# Altium PCB trs.PcbDoc
Units mm, origin at the board's own origin, x right, y up, seen from the top; angles counter-clockwise.
Board outline 152.4 x 101.6 mm, 2 copper layers (Top Layer, Bottom Layer); 39 components, 46 nets, 169 pads, 97 vias.
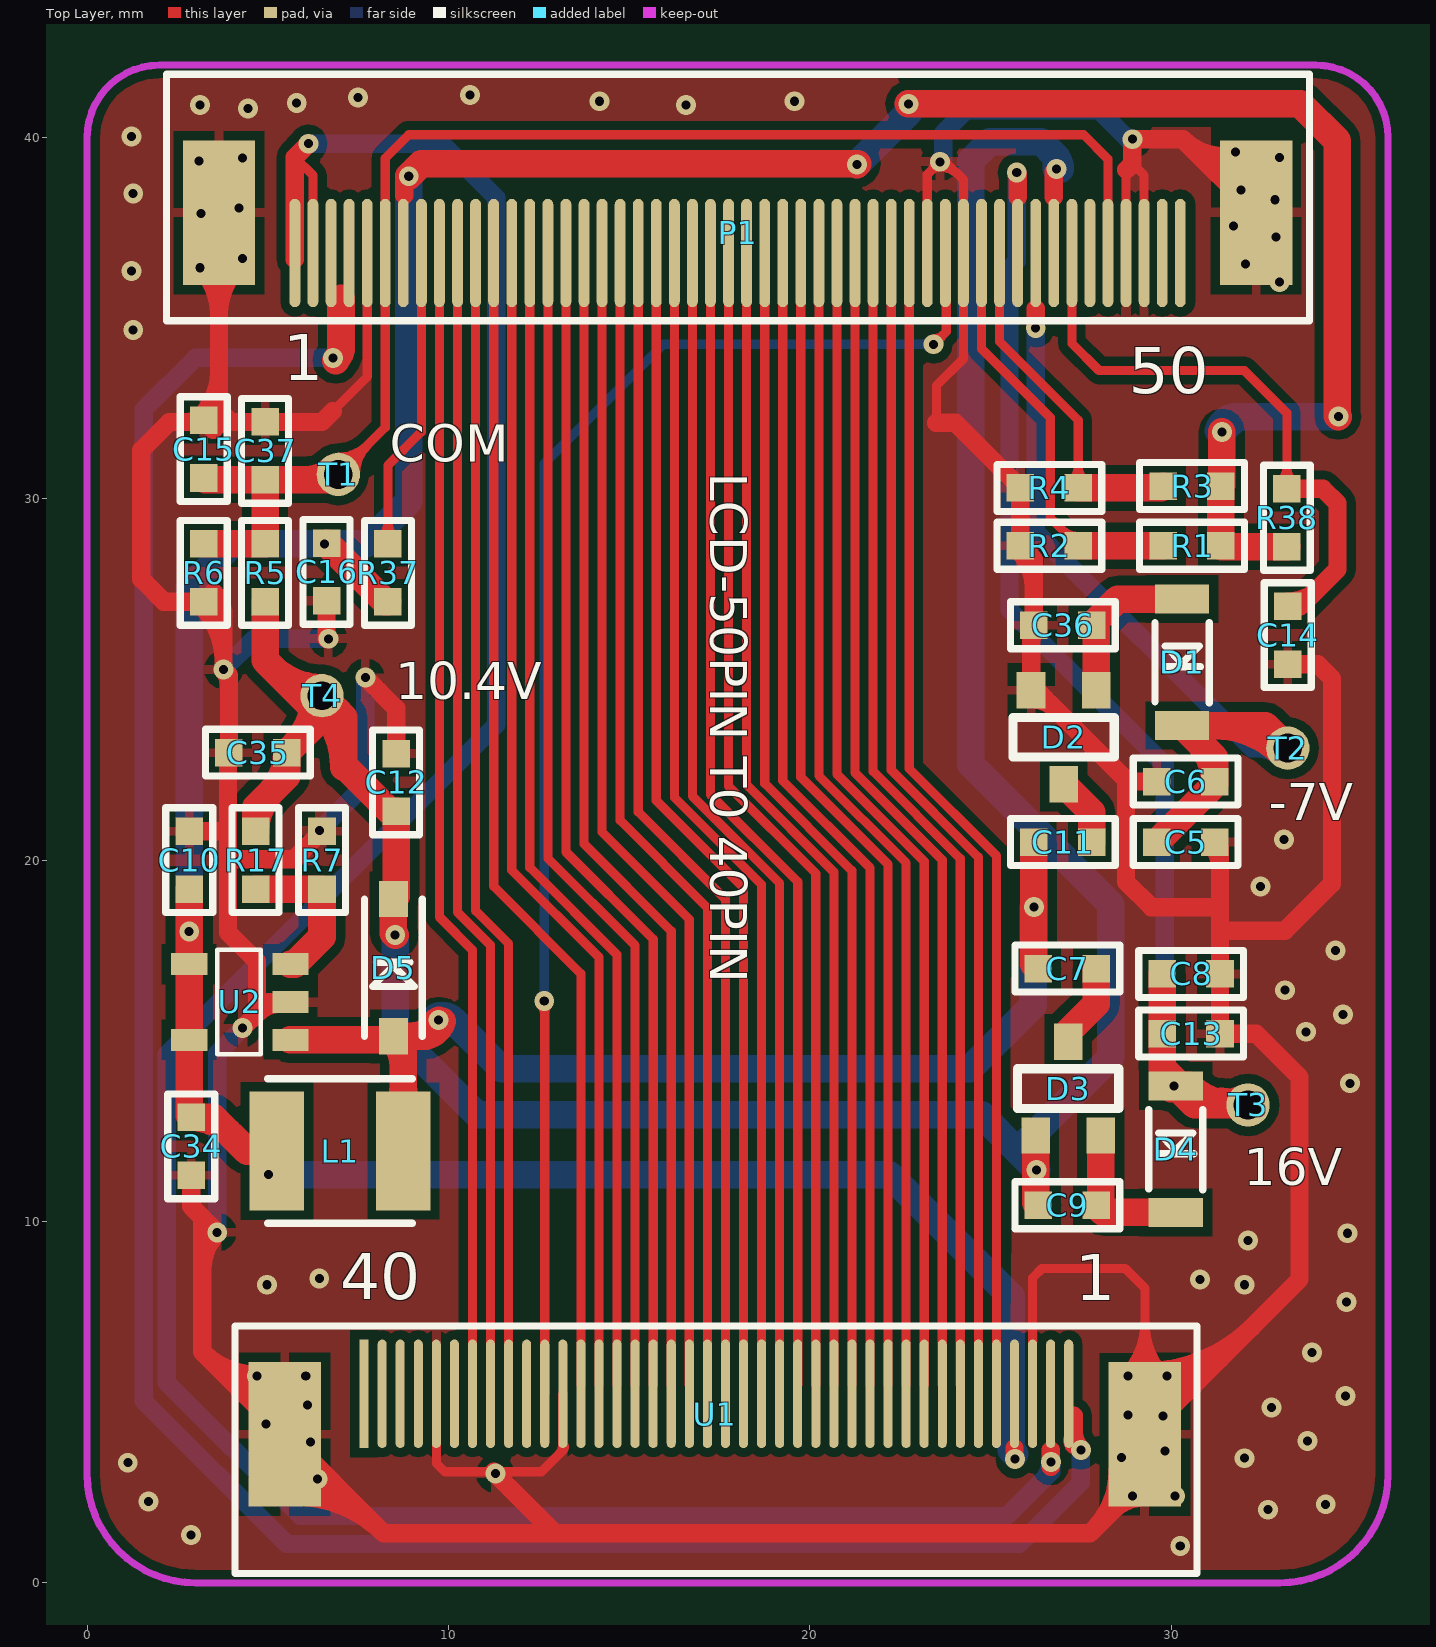
[diagram p0: Top Layer view]
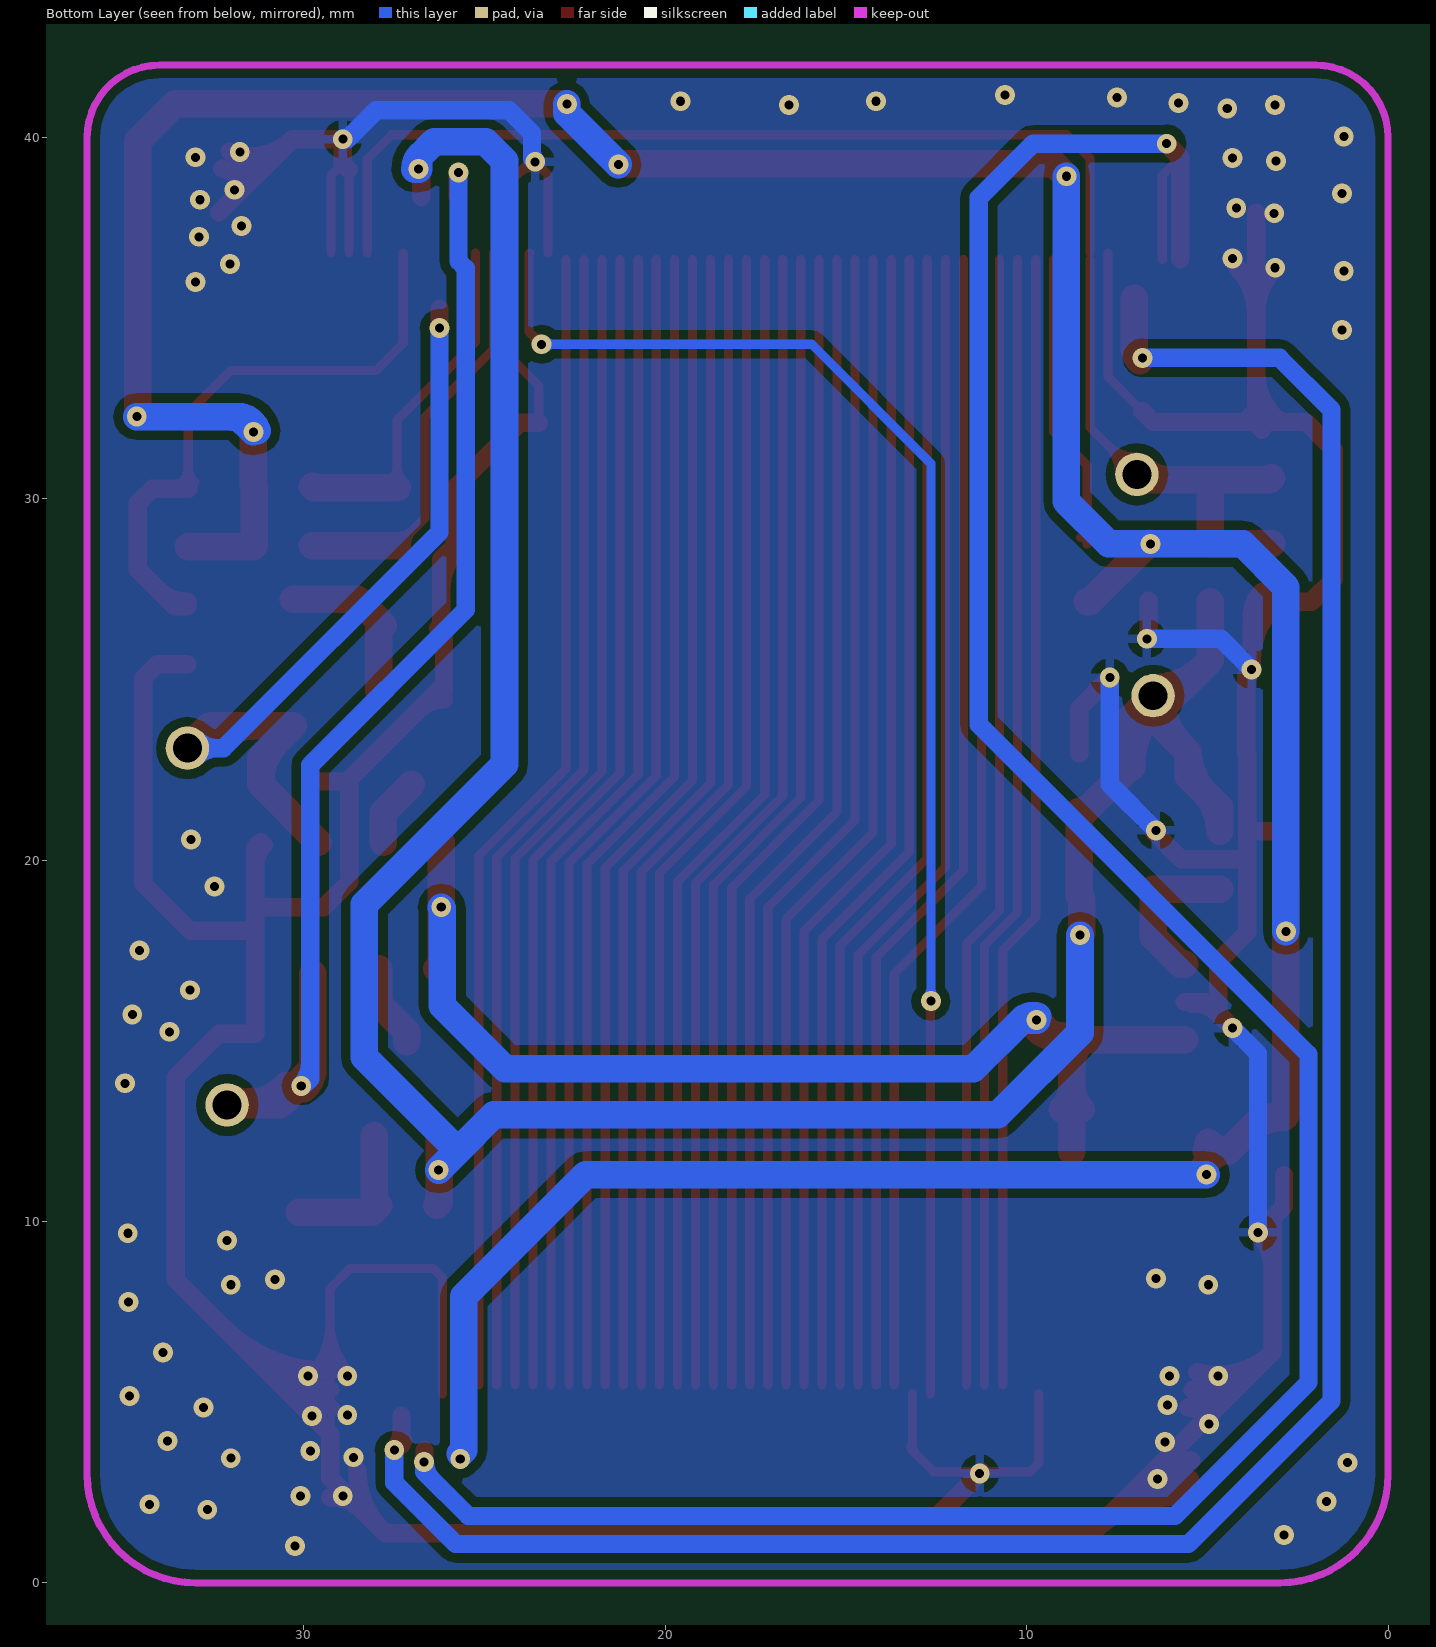
[diagram p1: Bottom Layer view, seen from below]

## Layer stack, top to bottom
Top Layer: signal copper 0.0356
Dielectric: dielectric 0.32, FR-4, Dk 4.8
Bottom Layer: signal copper 0.0356

## Board outline
-42.305,-35.158 110.095,-35.158 110.095,66.442 -42.305,66.442

## Design rules (kind name [scope] priority, off if disabled: settings)
Clearance [All] p1: gap=0.127
ComponentClearance [All] p1 off: gap=0.254 collisioncheckmode=3 verticalgap=0.01 showdistances=FALSE
Height [All] p1 off: minheight=0 maxheight=25.4 prefheight=12.7
HoleToHoleClearance [All] p1: gap=0 allowstackedmicrovias=TRUE
MinimumSolderMaskSliver [All] p1: minsoldermaskwidth=0
PolygonConnect [All] p1: connectstyle=Relief reliefconductorwidth=0.254 reliefentries=4 polygonreliefangle="90 Angle" airgapwidth=0.254
RoutingVias [All] p1: holewidth=0.25 width=0.55 viastyle="Through Hole" minholewidth=0.25 minwidth=0.55 maxholewidth=2 maxwidth=10
SilkToSilkClearance [All] p1: silktosilkclearance=0
SilkToSolderMaskClearance [IsPad] p1: minsilkscreentomaskgap=0 clearancetoexposedcopper=TRUE
SolderMaskExpansion [All] p1: expansion=0.102
Width [All] p1: maxlimit=2.54 minlimit=0.127 preferedwidth=0.127 minimp=50.000000 maximp=50.000000 favimp=50.000000
22 further rules are at their usual default settings.

## Components (designator, comment, footprint, x,y, rotation, side; value= is the part's Value field where it differs from the comment)
C5 "104" 0603C 29.6,20.5 r0 top
C6 "C10uF" 0603C 31.2,22.175 r180 top
C7 "C1UF" 0603C 26.325,17 r0 top
C8 "C10uF" 0603C 29.75,16.85 r0 top
C9 "C1UF" 0603C 26.325,10.45 r0 top
C10 "104" 0603C 2.825,19.2 r90 top
C11 "C1UF" 0603C 27.8,20.5 r180 top
C12 "104" 0603C 8.55,21.35 r90 top
C13 "104" 0603C 29.75,15.2 r0 top
C14 "104" 0603C 33.225,25.425 r90 top
C15 "104" 0603C 3.225,32.175 r270 top
C16 "104" 0603C 6.625,27.175 r90 top
C34 "C10uF" 0603C 2.88,12.88 r270 top
C35 "C10uF" 0603C 5.525,22.975 r180 top
C36 "C10uF" 0603C 27.8,26.5 r180 top
C37 "C10uF" 0603C 4.925,30.525 r90 top
D1 "ZMM3V9" LL34 29.55,27.225 r270 top
D2 "BAT54S" SOT-23-3 27.925,24.7 r180 top
D3 "BAT54S" SOT-23-3 26.25,12.375 r0 top
D4 "ZMM4V7" LL34 29.375,13.75 r270 top
D5 "MBR0520" SOD123 9.275,15.125 r90 top
L1 "Inductor-4.7uH" ins-443 9,9.95 r90 top
P1 "FPC50-0.5-UP" FPC50-0.5 18,35.175 r90 top locked
R1 "10K" 0603R 29.775,28.7 r0 top
R2 "10K" 0603R 27.425,28.7 r180 top
R3 "10K" 0603R 29.775,30.35 r0 top
R4 "10K" 0603R 27.425,30.3 r180 top
R5 "51K" 0603R 4.925,27.15 r90 top
R6 "39K" 0603R 3.225,27.15 r90 top
R7 "100K" 0603R 6.5,20.8 r270 top
R17 "R732K" 0603R 4.663,19.2 r90 top
R37 "10K" 0603R 8.325,28.75 r270 top
R38 "10K" 0603R 33.2,30.275 r270 top
T1 "TP" TEST_POINT 6.95,30.675 r0 top
T2 "TP" TEST_POINT 33.225,23.1 r0 top
T3 "TP" TEST_POINT 32.125,13.225 r90 top
T4 "TP" TEST_POINT 6.5,24.55 r90 top
U1 "AT043TN24" FPC40-N 27.164,5.232 r270 top locked
U2 "TPS61040" SOT23-5 5.625,15.025 r90 top

## Footprints (in the part's own frame and the unit in brackets; to place one, negate y for a bottom-side part, rotate by r counter-clockwise, add the part's x,y. Pads: shape width x height; smd on the part's side, far side on the other; paste and mask are expansions set on the pad)
0603C [mil]
  rect 30x30 smd: 1(0,0) 2(62.99,0)
  silkscreen extent -26,-26 89,26
0603R [mil]
  rect 30x30 smd: 1(0,0) 2(62.99,0)
  silkscreen extent -26,-26 89,26
FPC40-N [mm]
  rect 4x2 smd: 0(1.12,2.104) 0(1.12,-21.695)
  oval 3x0.25 smd: 1(0,0) 2(0,-0.5) 3(0,-1) 4(0,-1.5) 5(0,-2) 6(0,-2.5) 7(0,-3) 8(0,-3.5) 9(0,-4) 10(0,-4.5) 11(0,-5) 12(0,-5.5) 13(0,-6) 14(0,-6.5) 15(0,-7) 16(0,-7.5) 17(0,-8) 18(0,-8.5) 19(0,-9) 20(0,-9.5) 21(0,-10) 22(0,-10.5) 23(0,-11) 24(0,-11.5) 25(0,-12) 26(0,-12.5) 27(0,-13) 28(0,-13.5) 29(0,-14) 30(0,-14.5) 31(0,-15) 32(0,-15.5) 33(0,-16) 34(0,-16.5) 35(0,-17) 36(0,-17.5) 37(0,-18) 38(0,-18.5) 39(0,-19)
  rect 3x0.25 smd: 40(0,-19.5)
  silkscreen extent -1.88,-23.08 4.97,3.55
FPC50-0.5 [mm]
  rect 4x2 smd: 0(2.745,14.35) 0(2.745,-14.35)
  oval 3x0.3 smd: 1(1.625,12.25) 2(1.625,11.75) 3(1.625,11.25) 4(1.625,10.75) 5(1.625,10.25) 6(1.625,9.75) 7(1.625,9.25) 8(1.625,8.75) 9(1.625,8.25) 10(1.625,7.75) 11(1.625,7.25) 12(1.625,6.75) 13(1.625,6.25) 14(1.625,5.75) 15(1.625,5.25) 16(1.625,4.75) 17(1.625,4.25) 18(1.625,3.75) 19(1.625,3.25) 20(1.625,2.75) 21(1.625,2.25) 22(1.625,1.75) 23(1.625,1.25) 24(1.625,0.75) 25(1.625,0.25) 26(1.625,-0.25) 27(1.625,-0.75) 28(1.625,-1.25) 29(1.625,-1.75) 30(1.625,-2.25) 31(1.625,-2.75) 32(1.625,-3.25) 33(1.625,-3.75) 34(1.625,-4.25) 35(1.625,-4.75) 36(1.625,-5.25) 37(1.625,-5.75) 38(1.625,-6.25) 39(1.625,-6.75) 40(1.625,-7.25) 41(1.625,-7.75) 42(1.625,-8.25) 43(1.625,-8.75) 44(1.625,-9.25) 45(1.625,-9.75) 46(1.625,-10.25) 47(1.625,-10.75) 48(1.625,-11.25) 49(1.625,-11.75) 50(1.625,-12.25)
  silkscreen extent -0.25,-15.83 6.58,15.8
ins-443 [mm]
  rect 3.3x1.5 smd: 1(2,3.75) 2(2,0.25)
  silkscreen extent 0,0 4,4
LL34 [mm]
  rect 0.8x1.5 smd: 1(0,0.75) 2(3.5,0.75)
  silkscreen extent 0.65,0 2.88,1.5
SOD123 [mm]
  rect 1x0.8 smd: 1(0,0.8) 2(3.8,0.8)
  silkscreen extent 0,0 3.8,1.6
SOT23-5 [mm]
  rect 0.6x1 smd: 1(0,0) 2(1.05,0) 3(2.1,0) 4(2.1,2.8) 5(0,2.8)
  silkscreen extent -0.4,0.82 2.5,2.02
SOT-23-3 [mm]
  rect 0.8x1 smd: 1(0,0) 2(1.8,0) 3(0.9,2.6)
  silkscreen extent -0.5,0.75 2.3,1.85
TEST_POINT [mm]
  round 1.2 hole 0.8: 1(0,0)

## Part data
C5 C7 C9 C10 C11 C12 C13 C14 C15 C16: library part C0.1uF
C6 C8 C34 C35 C36 C37: library part "Cap Pol1", "Polarized Capacitor (Radial)"
D1 D4 D5: library part Diode
L1: library part Inductor-100uH
P1: library part LCD-7-50PIN
R1 R2 R3 R4 R5 R6 R7 R17 R37 R38: library part R1M

## Via types
v1: diameter 0.55, hole 0.25, Top Layer to Bottom Layer, 97 vias

## Nets (pads, with @x,y where several pads share a name; then routed paths per layer and width w, separated by ;. In a path a pad name is that pad's centre, name@x,y a point inside that pad or via, vN(x,y) a via of type N, cw(c..) or ccw(c..) an arc to the next point about the centre after c; other vN are vias at no path point)
3V3: C10.1 C16.2 C34.1 L1.1 P1.7 R1.2 R3.2 R37.2 R38.2 U1.4 U2.4 U2.5 | length 112.5
  Top Layer w0.508: 8.775,38.4 v1@8.775,38.775 ; 8.775,38.573 cw(c9.252,38.573) v1@8.915,38.91 ; v1@25.664,3.425 25.664,3.725
  Top Layer w0.762: C10.1 v1(2.825,18.025) U2.4 U2.5 2.825,12.935 C34.1 ; 3.93,12.445 ccw(c2.88,11.395) C34.1 ; L1.1@4.975,11.704 ccw(c4.425,11.212) 4.425,11.95 ; L1.1@4.975,12.196 cw(c4.425,12.688) 4.425,11.95 ; L1.1@5.025,11.95 4.425,11.95 ; L1.1@5.13,11.31 ccw(c4.425,11.241) 4.425,11.95 ; C16.2 8.25,27.15 R37.2 ; v1(8.9,38.925) 9.25,39.275 21.325,39.275 v1(21.3,39.25) ; v1(22.725,40.925) 33.575,40.925 34.6,39.9 34.6,32.3 v1(34.625,32.275) ; v1(31.4,31.85) 31.4,30.375 R3.2 R1.2 31.4,28.675 R38.2 ; C34.1 3.495,12.88 4.425,11.95
  Bottom Layer w0.762: v1(2.825,18.025) 2.825,27.55 4.025,28.75 v1(6.575,28.75) 7.725,28.75 8.9,29.925 v1(8.9,38.925) ; v1(5.025,11.3) 22.2,11.3 25.575,7.925 25.575,3.675 v1@25.675,3.575 ; v1(21.3,39.25) 22.725,40.675 v1(22.725,40.925) ; v1@31.298,31.88 cw(c31.825,31.726) 31.825,32.275 ; v1@31.325,31.925 cw(c32.17,31.08) 32.17,32.275 ; v1(31.4,31.85) 31.825,32.275 ; v1(34.625,32.275) 31.825,32.275
  other v1: 25.675,3.425
10V4: C9.1 C12.1 C35.1 D3.1 D5.2 P1.43 R5.1 R17.2 T4.1 | length 82.9
  Top Layer w0.508: 26.75,38.35 26.75,39.05 v1(26.825,39.125)
  Top Layer w0.762: R5.1 4.925,25.525 6.5,23.95 ; 5.065,21.865 ccw(c3.956,22.975) C35.1 ; 5.102,25.348 ccw(c6.5,26.746) T4.1@6.5,24.769 ; 5.131,21.931 ccw(c6.262,20.8) R17.2 4.663,21.462 5.525,22.325 C35.1 ; C35.1@5.702,23.152 ccw(c4.304,24.55) T4.1@6.281,24.55 ; T4.1@6.345,24.395 cw(c4.523,22.573) 7.1,22.573 ; T4.1@6.492,24.331 cw(c6.47,23.701) 7.1,23.701 ; v1(8.525,17.925) 8.475,17.975 D5.2 8.55,19 C12.1 8.375,21.35 7.1,22.625 7.1,23.95 T4.1 6.5,23.95 ; D3.1 26.25,10.525 C9.1 ; C35.1 6.5,23.95
  Bottom Layer w0.762: v1(8.525,17.925) 8.525,15.225 10.8,12.95 24.75,12.95 25.737,11.962 ; v1(26.275,11.425) 25.737,11.962 ; 26.776,39.499 cw(c26.402,39.125) v1@26.931,39.125 ; v1(26.825,39.125) 26.825,39.45 26.4,39.875 24.975,39.875 24.45,39.35 24.45,22.65 28.325,18.775 28.325,14.55 25.737,11.962
16V: C8.1 C13.1 D4.1 P1.41 T3.1 | length 38
  Top Layer w0.508: v1(25.725,39.025) 25.75,39 25.75,38.35
  Top Layer w0.762: 29.75,14.279 ccw(c30.604,14.279) D4.1@30,13.675 ; C8.1 C13.1 29.75,14.25 ; D4.1@30.003,13.672 cw(c30.536,14.25) 29.75,14.25 ; D4.1 30.65,13.225 ; D4.1@30.125,13.875 29.75,14.25 ; D4.1@30.488,13.763 ccw(c31.788,15.063) T3.1@31.788,13.225 ; D4.1@30.494,13.746 ccw(c31.056,13.631) 30.65,13.225 ; 31.389,13.332 ccw(c31.602,14.13) T3.1@32.015,13.415 ; T3.1 30.65,13.225
  Bottom Layer w0.508: v1(25.725,39.025) 25.725,36.575 25.525,36.375 25.525,26.925 29.825,22.625 29.825,13.95 30.025,13.75 v1(30.075,13.75) ; 29.825,14.404 ccw(c30.729,14.404) v1@30.09,13.765
-7V: C5.1 C6.1 D1.2 P1.42 T2.1 | length 28.4
  Top Layer w0.508: v1(26.25,34.725) 26.25,35.256
  Top Layer w0.762: C5.1 31.2,22.1 C6.1 ; D1.2@30.669,23.725 ccw(c31.56,23.725) 30.93,23.095 ; 30.74,23.285 cw(c29.631,22.175) C6.1 ; 31.187,23.725 cw(c31.187,21.062) T2.1@33.07,22.945 ; T2.1 32.6,23.725 D1.2 31.2,22.825 C6.1
  Bottom Layer w0.508: v1(26.25,34.725) 26.25,29.075 32.225,23.1 T2.1 ; T2.1@32.98,22.855 ccw(c32.39,22.265) 32.39,23.1 ccw(c32.39,23.935) T2.1@32.98,23.345
GND: C5.2 C6.2 C8.2 C10.2 C12.2 C13.2 C14.1 C15.1 C16.1 C34.2 C35.2 C36.2 C37.2 D2.2 P1.0 P1.5 P1.36 P1.38 P1.47 P1.48 R2.2 R4.2 R6.1 R7.1 U1.0 U1.3 U1.29 U1.36 U2.2 | length 237
  Top Layer w0.254: 6.8,32.425 7.75,33.375 P1.5 ; U1.36 9.664,3.311 9.9,3.075 11.25,3.075 12.575,3.075 13.164,3.664 ; 13.031,3.531 ccw(c12.705,3.857) U1.29@13.166,3.857 ; U1.29 13.164,3.664 ; U1.29@13.165,3.858 cw(c13.066,3.762) 13.164,3.664 ; P1.36 23.25,38.975 v1(23.6,39.325) 23.75,39.325 24.25,38.825 P1.38 24.25,33.875 23.5,33.125 23.5,32.1 ; v1@23.452,39.325 cw(c23.095,39.325) 23.347,39.072 cw(c23.6,38.82) 23.6,39.177 cw(c23.6,38.458) 24.109,38.966 ; U1.3 26.164,8.439 26.425,8.7 28.725,8.7 29.275,8.15 29.275,4.119 U1.0@29.268,4.112 ; U1.0@28.651,5.729 ccw(c27.143,7.237) 29.275,7.237 ; P1.47 28.75,39.1 28.754,39.104 ; U1.0@28.83,5.55 ccw(c27.757,6.623) 29.275,6.623 ; 28.925,39.275 29.25,38.95 P1.48 ; 29.275,6.589 ccw(c30.745,6.589) U1.0@29.706,5.55 ; 29.275,7.203 ccw(c31.359,7.203) v1(29.885,5.729)
  Top Layer w0.508: 2.798,32.125 ccw(c2.798,32.602) 3.135,32.265 ccw(c1.892,33.508) 3.65,33.508 ; C10.2 3.85,20.8 3.9,20.85 ; C34.2 2.88,10.42 3.187,10.113 ; v1(3.122,36.393) cw(c1.849,35.119) 3.65,35.119 cw(c5.451,35.119) P1.0@4.178,36.393 ; R6.1@3.135,27.06 cw(c1.591,25.516) v1@3.775,25.516 ; 3.187,8.653 cw(c4.647,8.653) v1@3.615,9.685 ; R6.1@3.207,27.024 cw(c3.117,26.372) 3.775,26.372 ; C15.1@3.315,32.265 ccw(c3.652,32.602) 3.652,32.125 ; R6.1@3.494,27.419 cw(c2.817,26.742) 3.775,26.742 ; C15.1@3.494,31.906 ccw(c3.119,32.281) 3.65,32.281 ; v1(3.6,9.7) 3.187,10.113 ; P1.0@3.65,37.92 3.65,32.45 3.975,32.125 ; v1@3.76,25.26 cw(c3.362,24.862) 3.925,24.862 ; 3.81,5.771 ccw(c4.981,6.941) U1.0@5.408,5.342 ; v1(4.3,15.35) 4.7,15.75 ; 4.433,5.148 ccw(c5.243,5.958) U1.0@5.539,4.851 ; U1.0@5.277,5.833 cw(c4.718,7.924) 3.188,6.393 ; U2.2@5.423,16.029 ccw(c5.376,15.074) 4.7,15.75 ; U1.0@5.449,3.381 cw(c5.564,1.861) v1@6.642,2.939 ; U1.0@5.487,2.875 cw(c5.674,0.408) 7.424,2.157 ; U1.0@5.525,2.368 cw(c5.785,-1.046) 8.206,1.375 ; U2.2 5.025,16.075 4.7,15.75 ; R7.1@6.475,20.775 5.725,20.025 3.9,20.025 ; v1@6.625,26.125 C16.1 ; 6.8,32.425 6.5,32.125 C37.2 3.975,32.125 ; v1(7.7,25.05) 8.55,24.2 C12.2 ; v1@11.25,3.075 12.95,1.375 ; 23.5,32.1 24.025,32.1 R4.2 R2.2 26.2,28.325 C36.2 26.125,26.425 D2.2 26.275,24.7 28.75,22.225 ; R2.2@25.735,28.61 cw(c24.613,27.488) 26.2,27.488 ; D2.2@26.125,24.454 cw(c26.125,23.498) 26.801,24.174 ; 26.125,26.012 cw(c26.688,26.012) C36.2@26.29,26.41 ; 27.84,1.465 ccw(c26.192,3.112) U1.0@28.522,3.112 ; 28.368,1.993 cw(c29.268,1.094) U1.0@29.268,2.366 ; 28.758,39.1 28.925,39.267 28.925,39.275 v1(28.925,39.95) 30.32,39.95 ; U1.0@29.268,4.112 29.268,2.893 27.75,1.375 12.95,1.375 ; U1.0@29.268,4.842 ccw(c29.268,6.604) 30.514,5.358 ; U1.0@29.268,5.35 ccw(c29.268,8.339) 31.381,6.225 ; U1.0@29.268,5.858 ccw(c29.268,10.073) 32.249,7.093 ; U1.0@29.275,4.119 33.55,8.394 33.55,14 32.35,15.2 C13.2 C8.2 31.35,18.05 ; C6.2 28.8,22.175 28.75,22.225 ; 30.855,39.415 ccw(c31.762,40.322) P1.0@32.258,39.139 ; C5.2@31.11,20.41 cw(c30.531,19.831) 31.35,19.831 ; C5.2 31.35,20.35 31.35,18.7 ; P1.0@32.061,39.608 cw(c31.445,41.075) 30.32,39.95 ; P1.0@32.35,37.92 30.32,39.95 ; C14.1 34.05,25.425 34.45,25.025 34.45,19.35 33.15,18.05 31.35,18.05 ; 3.187,6.393 3.187,10.113 ; 3.187,6.393 5.469,4.112 8.206,1.375 ; 3.9,20.025 3.9,20.85 ; 3.9,20.025 3.9,18 4.7,17.2 4.7,15.75 ; 3.9,20.85 3.9,22.95 C35.2 3.925,25.125 v1(3.775,25.275) 3.775,26.6 R6.1 2.125,27.15 1.5,27.775 1.5,31.35 2.275,32.125 3.975,32.125 ; 8.206,1.375 12.95,1.375 ; 28.75,22.225 28.75,19.4 29.45,18.7 31.35,18.7 ; 31.35,18.05 31.35,18.7
  Bottom Layer w0.508: v1(3.6,9.7) 3.6,14.65 v1(4.3,15.35) ; v1(3.775,25.275) 4.625,26.125 v1(6.675,26.125) ; v1(6.425,20.825) 7.7,22.1 v1(7.7,25.05) ; v1@23.585,39.34 ccw(c23.337,39.588) 23.688,39.588 ; v1(23.6,39.325) 23.688,39.413 23.688,40.116 24.322,40.75 28,40.75 28.8,39.95 v1(28.925,39.95) ; 28.676,40.074 ccw(c28.925,40.323) v1@28.925,39.971
  other v1: 30.25,1.025 2.875,1.325 32.675,2.025 34.275,2.175 1.7,2.25 28.925,2.4 30.1,2.4 6.375,2.875 11.3,3.025 1.125,3.325 32.025,3.45 28.625,3.475 29.825,3.65 6.175,3.9 33.775,3.925 4.95,4.4 29.775,4.619 28.8,4.65 32.775,4.85 6.1,4.925 34.825,5.175 4.7,5.725 6.05,5.725 28.8,5.725 33.9,6.375 34.85,7.775 4.975,8.25 32.025,8.25 30.8,8.4 6.425,8.425 32.125,9.475 34.875,9.675 34.95,13.825 33.725,15.25 34.75,15.725 33.15,16.4 34.55,17.5 32.475,19.275 33.125,20.575 1.275,34.675 33,36 1.225,36.3 32.05,36.5 4.3,36.65 32.9,37.25 31.725,37.55 3.15,37.9 4.2,38.05 32.875,38.275 1.275,38.45 31.925,38.55 3.1,39.35 4.3,39.425 33,39.45 31.775,39.6 1.225,40.025 4.45,40.8 3.125,40.9 16.575,40.9 5.8,40.95 14.175,41 19.575,41 7.5,41.1 10.6,41.175
LCD-B0: P1.19 U1.21 | length 32.1
  Top Layer w0.254: P1.19@14.75,36.625 14.75,21.1 17.164,18.686 U1.21@17.164,5.482
LCD-B1: P1.18 U1.22 | length 32.1
  Top Layer w0.254: P1.18@14.25,36.625 14.25,20.775 16.664,18.361 U1.22@16.664,5.482
LCD-B2: P1.17 U1.23 | length 32.1
  Top Layer w0.254: P1.17@13.75,36.625 13.75,20.45 16.164,18.036 U1.23@16.164,5.482
LCD-B3: P1.16 U1.24 | length 32.1
  Top Layer w0.254: P1.16@13.25,36.625 13.25,20.225 15.664,17.811 U1.24@15.664,5.482
LCD-B4: P1.15 U1.25 | length 32.1
  Top Layer w0.254: P1.15@12.75,36.625 12.75,20.05 15.164,17.636 U1.25@15.164,5.482
LCD-B5: P1.14 U1.26 | length 32.1
  Top Layer w0.254: P1.14@12.25,36.625 12.25,19.8 14.664,17.386 U1.26@14.664,5.482
LCD-B6: P1.13 U1.27 | length 32.1
  Top Layer w0.254: P1.13@11.75,36.625 11.75,19.725 14.164,17.311 U1.27@14.164,5.482
LCD-B7: P1.12 U1.28 | length 32.1
  Top Layer w0.254: P1.12@11.25,36.625 11.25,19.275 13.664,16.861 U1.28@13.664,5.482
LCD-CLK: P1.37 U1.30 | length 42.8
  Top Layer w0.254: v1@12.545,15.995 cw(c12.259,15.709) 12.664,15.709 ; v1(12.65,16.1) 12.664,16.086 U1.30 ; 12.664,15.777 cw(c12.973,15.777) v1@12.755,15.995 ; v1(23.425,34.275) 23.775,34.625 23.775,36.775 P1.37 ; v1@23.425,34.423 ccw(c23.425,34.78) 23.678,34.528 ccw(c23.93,34.275) v1@23.573,34.275
  Bottom Layer w0.254: v1@12.545,16.205 ccw(c12.293,16.457) 12.65,16.457 ccw(c13.007,16.457) v1@12.755,16.205 ; v1(12.65,16.1) 12.65,30.975 15.95,34.275 v1(23.425,34.275) ; v1@23.32,34.17 ccw(c23.068,33.918) 23.068,34.275 ccw(c23.068,34.632) v1@23.32,34.38
LCD-DEN: P1.9 U1.34 | length 31.5
  Top Layer w0.254: P1.9@9.75,36.625 9.75,18.425 10.664,17.511 U1.34@10.664,5.482
LCD-G0: P1.27 U1.13 | length 32.1
  Top Layer w0.254: P1.27@18.75,36.625 18.75,22.125 21.164,19.711 U1.13@21.164,5.482
LCD-G1: P1.26 U1.14 | length 32.1
  Top Layer w0.254: P1.26@18.25,36.625 18.25,22.086 20.664,19.672 U1.14@20.664,5.482
LCD-G2: P1.25 U1.15 | length 32.1
  Top Layer w0.254: P1.25@17.75,36.625 17.75,22.047 20.164,19.633 U1.15@20.164,5.482
LCD-G3: P1.24 U1.16 | length 32.1
  Top Layer w0.254: P1.24@17.25,36.625 17.25,21.814 19.664,19.4 U1.16@19.664,5.482
LCD-G4: P1.23 U1.17 | length 32.1
  Top Layer w0.254: P1.23@16.75,36.625 16.75,21.775 19.164,19.361 U1.17@19.164,5.482
LCD-G5: P1.22 U1.18 | length 32.1
  Top Layer w0.254: P1.22@16.25,36.625 16.25,21.736 18.664,19.322 U1.18@18.664,5.482
LCD-G6: P1.21 U1.19 | length 32.1
  Top Layer w0.254: P1.21@15.75,36.625 15.75,21.65 18.164,19.236 U1.19@18.164,5.482
LCD-G7: P1.20 U1.20 | length 32.1
  Top Layer w0.254: P1.20@15.25,36.625 15.25,21.336 17.664,18.922 U1.20@17.664,5.482
LCD-HS: P1.11 U1.32 | length 31.5
  Top Layer w0.254: P1.11@10.75,36.625 10.75,18.6 11.664,17.686 U1.32@11.664,5.482
LCD-LR: P1.39 R1.1 R2.1 | length 12.5
  Top Layer w0.254: P1.39 24.75,34.15 26.65,32.25 26.65,29.475 R2.1 ; R2.1@27.171,28.7 ccw(c26.558,28.7) 26.991,29.134 ccw(c27.425,29.567) R2.1@27.425,28.954
  Top Layer w0.762: R2.1 R1.1
LCD-R0: P1.35 U1.5 | length 32.1
  Top Layer w0.254: P1.35@22.75,36.625 22.75,22.533 25.164,20.119 U1.5@25.164,5.482
LCD-R1: P1.34 U1.6 | length 32.1
  Top Layer w0.254: P1.34@22.25,36.625 22.25,22.494 24.664,20.08 U1.6@24.664,5.482
LCD-R2: P1.33 U1.7 | length 32.1
  Top Layer w0.254: P1.33@21.75,36.625 21.75,22.455 24.164,20.041 U1.7@24.164,5.482
LCD-R3: P1.32 U1.8 | length 32.1
  Top Layer w0.254: P1.32@21.25,36.625 21.25,22.416 23.664,20.002 U1.8@23.664,5.482
LCD-R4: P1.31 U1.9 | length 32.1
  Top Layer w0.254: P1.31@20.75,36.625 20.75,22.378 23.164,19.964 U1.9@23.164,5.482
LCD-R5: P1.30 U1.10 | length 32.1
  Top Layer w0.254: P1.30@20.25,36.625 20.25,22.339 22.664,19.925 U1.10@22.664,5.482
LCD-R6: P1.29 U1.11 | length 32.1
  Top Layer w0.254: P1.29@19.75,36.625 19.75,22.3 22.164,19.886 U1.11@22.164,5.482
LCD-R7: P1.28 U1.12 | length 32.1
  Top Layer w0.254: P1.28@19.25,36.625 19.25,22.2 21.664,19.786 U1.12@21.664,5.482
LCD-UD: P1.40 R3.1 R4.1 | length 10.7
  Top Layer w0.254: P1.40 25.25,34.35 27.425,32.175 R4.1 ; R4.1@27.245,30.48 ccw(c26.812,30.913) 27.425,30.913 ccw(c28.038,30.913) R4.1@27.605,30.48
  Top Layer w0.762: R4.1 29.725,30.3 R3.1
LCD-VS: P1.10 U1.33 | length 31.5
  Top Layer w0.254: P1.10@10.25,36.625 10.25,18.561 11.164,17.647 U1.33@11.164,5.482
LED+: P1.1 P1.2 U1.2 | length 76.7
  Top Layer w0.254: 5.75,39.45 6.25,38.95 P1.2@6.25,36.625 ; v1@26.664,3.214 26.675,3.225 v1(26.675,3.35)
  Top Layer w0.508: P1.1@5.75,36.625 5.75,39.45 v1(6.125,39.825) ; v1@26.664,3.214 26.664,3.675
  Bottom Layer w0.508: v1(6.125,39.825) 9.825,39.825 11.325,38.325 11.325,23.75 2.2,14.625 2.2,5.55 5.9,1.85 25.45,1.85 26.675,3.075 v1(26.675,3.35) ; 26.445,2.845 ccw(c25.939,3.35) v1@26.654,3.35
LED-: P1.3 P1.4 U1.1 | length 66.1
  Top Layer w0.508: v1(6.8,33.9) 7.025,34.125 ; U1.1@27.255,3.948 cw(c27.147,3.84) v1@27.3,3.84 ; v1@27.3,3.825 27.3,4.621 ; 27.3,4.209 ccw(c28.034,4.209) v1@27.515,3.69
  Top Layer w0.762: v1@6.875,33.825 ccw(c6.513,34.187) 7.025,34.187 ; 7.025,34.125 7.025,35.55
  Bottom Layer w0.508: v1(6.8,33.9) 3,33.9 1.565,32.465 1.565,5.035 5.525,1.075 25.8,1.075 27.5,2.775 v1(27.5,3.675)
NetC7_1: C7.1 C11.2 D5.1 L1.2 U2.1 | length 38.4
  Top Layer w0.762: U2.1 8.375,15.025 D5.1 ; D5.1@8.462,15.012 cw(c7.765,14.315) 8.75,14.315 ; L1.2@8.489,13.111 ccw(c7.859,13.741) 8.75,13.741 ccw(c9.641,13.741) L1.2@9.011,13.111 ; L1.2 8.75,14.85 D5.1 ; 8.895,15.125 ccw(c8.895,16.405) v1@9.8,15.5 ; v1(9.725,15.575) 9.275,15.125 ; v1@9.827,15.547 cw(c9.275,15.697) 9.275,15.125 ; v1(26.2,18.7) C11.2 26.2,17.125 C7.1 ; D5.1 9.275,15.125
  Bottom Layer w0.762: v1@9.69,15.675 cw(c9.828,15.278) 10.125,15.575 ; v1(9.725,15.575) 10.125,15.575 ; v1@9.725,15.681 cw(c9.725,14.971) 10.227,15.473 ; v1(26.2,18.7) 26.175,18.675 26.175,15.975 24.425,14.225 11.475,14.225 10.125,15.575
NetC7_2: C7.2 D3.3 | length 2.3
  Top Layer w0.762: D3.3 27.15,15.25 27.925,16.025 C7.2
NetC9_2: C9.2 D3.2 D4.2 | length 4.8
  Top Layer w0.762: D3.2 28.05,10.575 C9.2 ; 28.408,10.25 cw(c28.408,10.933) C9.2 ; D4.2 28.125,10.25 C9.2
NetC11_1: C11.1 D2.3 | length 1.9
  Top Layer w0.762: D2.3 27.8,21.325 C11.1
NetC14_2: C14.2 P1.44 R38.1 | length 18.4
  Top Layer w0.254: P1.44 27.25,34.3 28,33.55 32.025,33.55 33.2,32.375 R38.1 ; R38.1@33.02,30.455 ccw(c32.587,30.888) 33.2,30.888 ccw(c33.813,30.888) R38.1@33.38,30.455
  Top Layer w0.508: R38.1 34.2,30.275 34.6,29.875 34.6,28.05 33.575,27.025 C14.2 ; C14.2@33.225,27.152 ccw(c33.225,28.304) 34.039,27.489
NetC15_2: C15.2 C37.1 P1.6 P1.46 R5.2 R6.2 T1.1 | length 42.2
  Top Layer w0.254: T1.1@6.8,30.525 T1.1 8.25,31.975 P1.6@8.25,36.625 ; T1.1@6.95,31.148 ccw(c6.95,32.29) 7.757,31.482 ccw(c8.565,30.675) T1.1@7.423,30.675 ; P1.6 8.25,39.425 8.9,40.075 27.575,40.075 28.25,39.4 P1.46
  Top Layer w0.762: R6.2 R5.2 C37.1 ; C15.2 3.275,30.525 C37.1 ; 6.059,30.525 ccw(c6.059,31.566) T1.1@6.795,30.83 ; T1.1@6.8,30.525 C37.1
NetC36_1: C36.1 D1.1 D2.1 | length 4.7
  Top Layer w0.762: D2.1 27.925,26.375 C36.1 28.525,27.225 D1.1
NetP1_8: P1.8 R37.1 | length 9.2
  Top Layer w0.254: R37.1@8.145,28.93 ccw(c7.712,29.363) 8.325,29.363 ccw(c8.938,29.363) R37.1@8.505,28.93 ; R37.1 8.325,30.925 9.25,31.85 P1.8@9.25,36.625
NetR7_2: R7.2 R17.1 U2.3 | length 4.3
  Top Layer w0.762: R17.1 R7.2 6.5,17.875 5.75,17.125 U2.3
pads on no net: P1.45 P1.49 P1.50 U1.31 U1.35 U1.37 U1.38 U1.39 U1.40

## Polygon pours and split planes (outlines as drawn)
GND on Top Layer "Bottom Layer-No Net" (solid, remove dead copper, pour order 3): -1.225,43.025 42.15,43.025 43.25,41.925 39.525,38.2 39.525,-3.8 -0.825,-3.8 -1.575,-3.05
GND on Bottom Layer "Bottom Layer-No Net" (solid, remove dead copper, pour order 5): -1.1,42.925 -1.05,42.975 39,42.975 39,-0.9 37.95,-1.95 37.6,-1.6 -0.875,-1.6

## Keep-outs
Keep-Out Layer:
  lines w0.2: 0,3 ccw(c3,3) 3,0 33,0 ccw(c33,3) 36,3 36,40 ccw(c34,40) 34,42 2,42 ccw(c2,40) 0,40 0,3

## Silkscreen, mask and mechanical layers (free items; w line width, h text height)
Top Overlay:
  text "1" at 5.425,33.275 h1.27
  text "50" at 28.825,32.925 h1.27
  text "COM" at 8.375,31.025 h1.02
  text "LCD-50PIN T0 40PIN" at 17.25,30.725 h1.02 r270
  text "10.4V" at 8.525,24.45 h1.02
  text "-7V" at 32.7,21.1 h1.02
  text "16V" at 32,11 h1.02
  text "40" at 7,7.85 h1.27
  text "1" at 27.35,7.825 h1.27